# Altium PCB DVR8412.PcbDoc
Units mil, origin at the board's own origin, x right, y up, seen from the top; angles counter-clockwise.
Board outline 2960 x 1810 mil, 2 copper layers (Top Layer, Bottom Layer), stack 61.756 mil thick; 51 components, 30 nets, 153 pads, 377 vias.
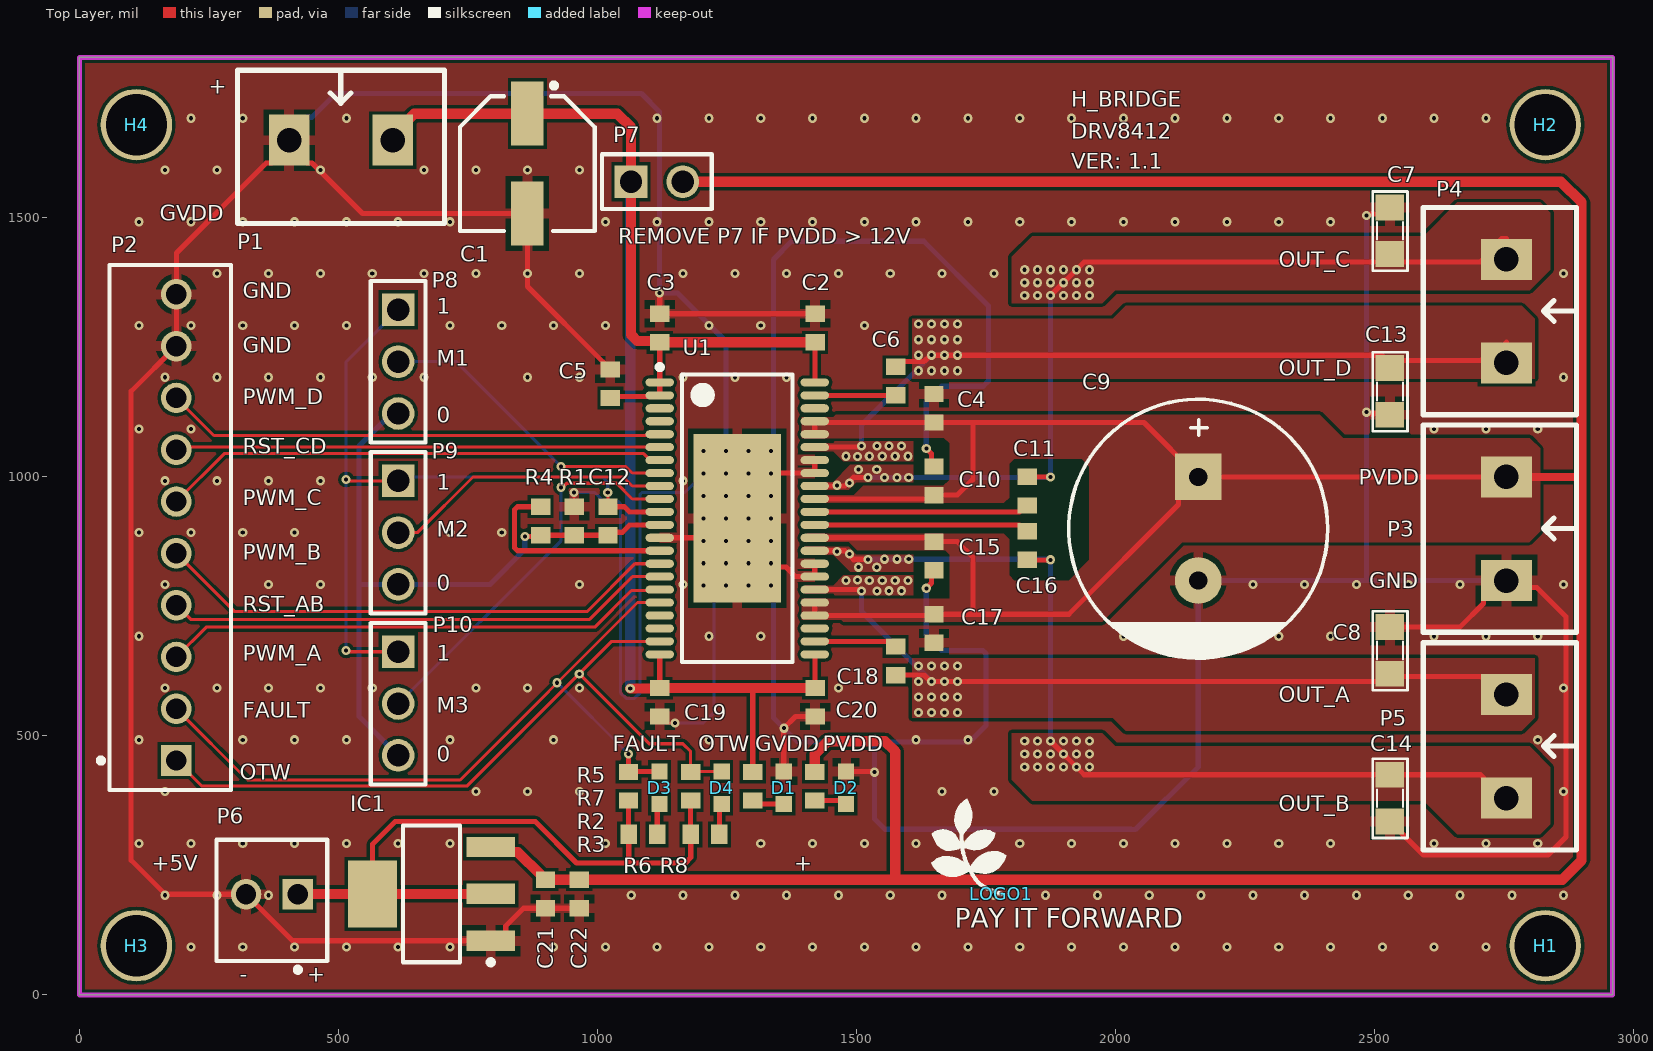
[diagram p0: Top Layer view]
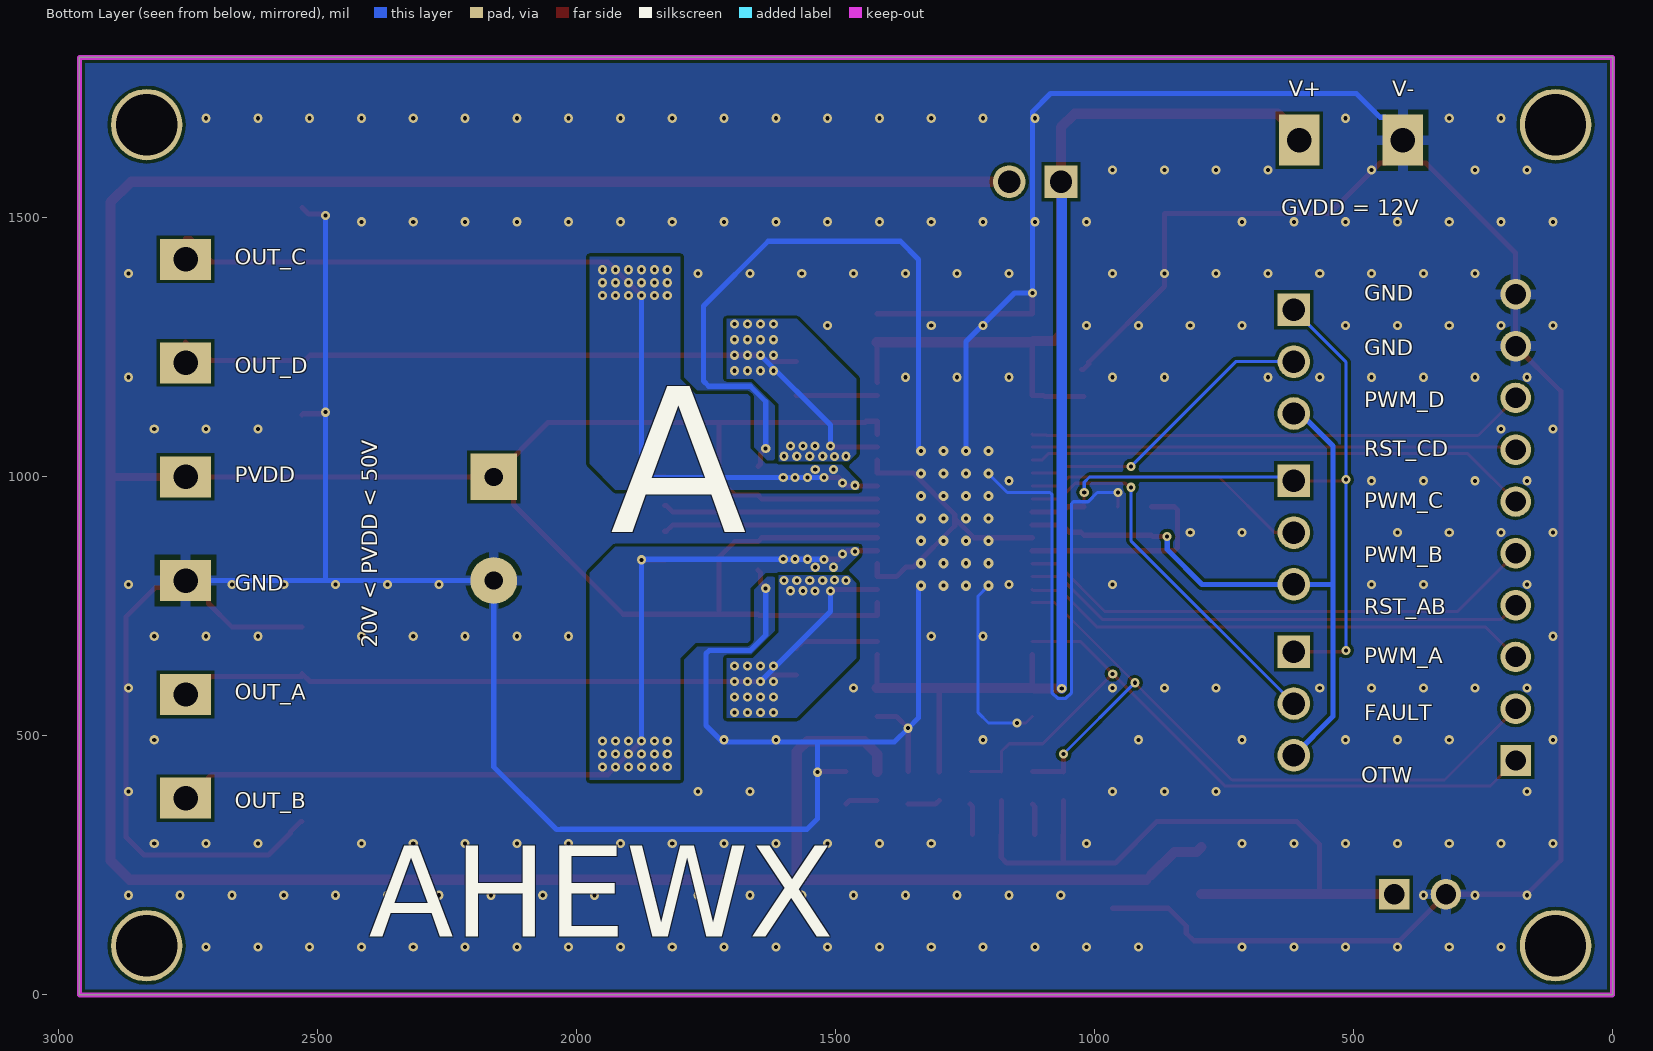
[diagram p1: Bottom Layer view, seen from below]
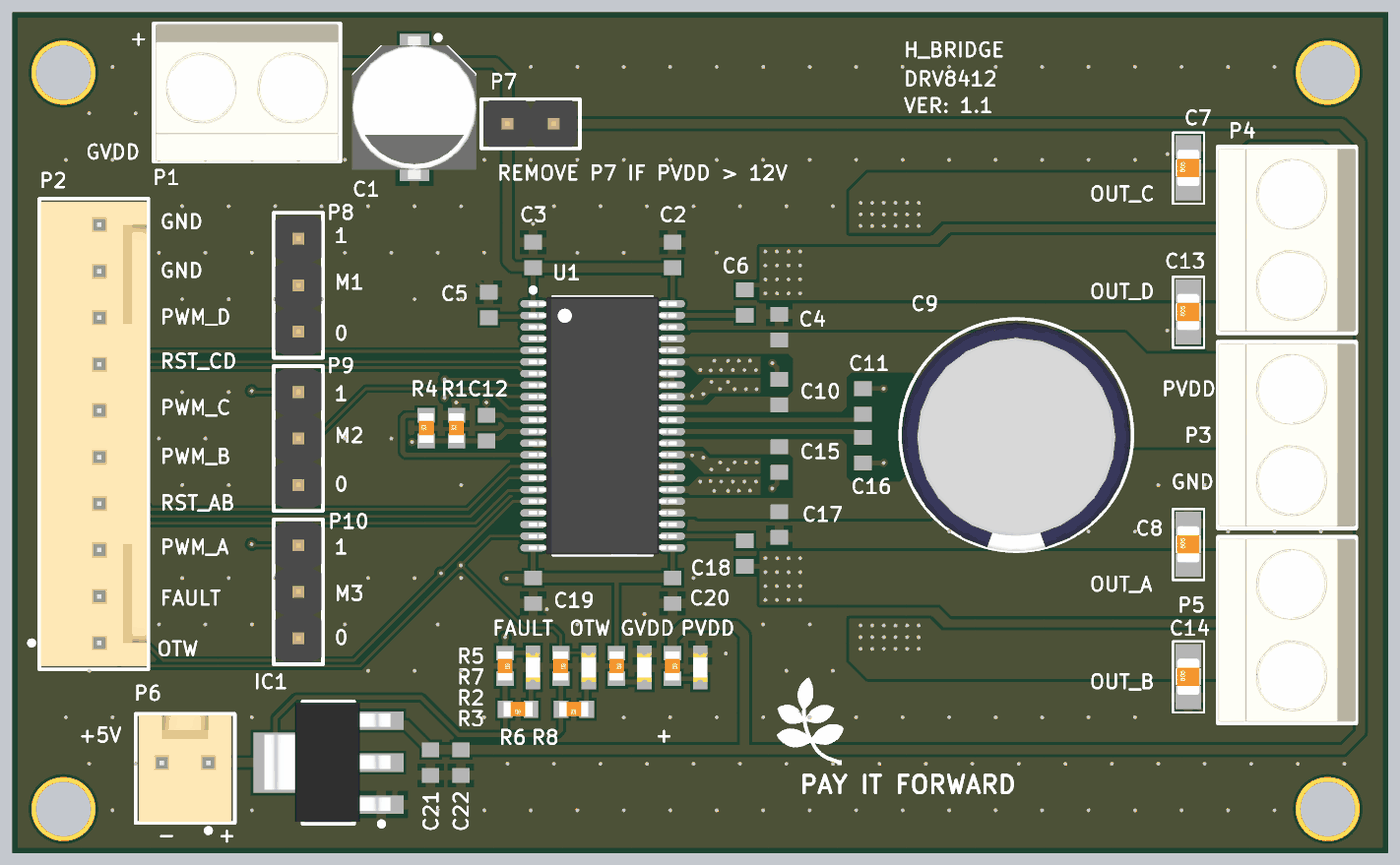
[diagram p2: 3D render of the assembled board from above, using the file's embedded part models]

## Layer stack, top to bottom
Top Solder: solder mask 1, SM-001, Dk 4
Top Layer: signal copper 1.378
Dielectric 1: core 59, Core-043, Dk 4.3
Bottom Layer: signal copper 1.378
Bottom Solder: solder mask 1, SM-001, Dk 4

## Board outline
0,0 2960,0 2960,1810 0,1810

## Design rules (kind name [scope] priority, off if disabled: settings)
Clearance [All] p1: gap=6 ignorepadtopadclearanceinfootprint=FALSE
HoleSize [All] p1: absolutevalues=TRUE maxlimit=150 minlimit=1 maxpercent=80.000 minpercent=20.000
MinimumSolderMaskSliver [All] p1: minsoldermaskwidth=5
PolygonConnect PolygonConnect_PVDD [InNet('PVDD') vs InNet('PVDD')] p1: connectstyle=Direct reliefconductorwidth=10 reliefentries=4 polygonreliefangle="90 Angle" airgapwidth=10
PolygonConnect PolygonConnect_OUTD [InNet('OUTD') vs InNet('OUTD')] p2: connectstyle=Direct reliefconductorwidth=10 reliefentries=4 polygonreliefangle="90 Angle" airgapwidth=10
PolygonConnect PolygonConnect_OUTC [InNet('OUTC') vs InNet('OUTC')] p3: connectstyle=Direct reliefconductorwidth=10 reliefentries=4 polygonreliefangle="90 Angle" airgapwidth=10
PolygonConnect PolygonConnect_OUTB [InNet('OUTB') vs InNet('OUTB')] p4: connectstyle=Direct reliefconductorwidth=10 reliefentries=4 polygonreliefangle="90 Angle" airgapwidth=10
PolygonConnect PolygonConnect_OUTA [InNet('OUTA') vs InNet('OUTA')] p5: connectstyle=Direct reliefconductorwidth=10 reliefentries=4 polygonreliefangle="90 Angle" airgapwidth=10
PolygonConnect PolygonConnect_GND [InNet('GND') vs InNet('GND')] p6: thpad.connectstyle=Relief thpad.reliefconductorwidth=20 thpad.reliefentries=4 thpad.polygonreliefangle="90 Angle" thpad.airgapwidth=10 smdpad.connectstyle=Relief smdpad.reliefconductorwidth=20 smdpad.reliefentries=4 smdpad.polygonreliefangle="90 Angle" smdpad.airgapwidth=10 via.connectstyle=Direct via.reliefconductorwidth=10 via.reliefentries=4 via.polygonreliefangle="90 Angle" via.airgapwidth=10
PolygonConnect [All] p7: connectstyle=Relief reliefconductorwidth=10 reliefentries=4 polygonreliefangle="90 Angle" airgapwidth=10
RoutingVias [All] p1: holewidth=28 width=50 viastyle="Through Hole" minholewidth=7.87 minwidth=17.72 maxholewidth=150 maxwidth=150
SilkToSilkClearance [All] p1: silktosilkclearance=0
SilkToSolderMaskClearance [IsPad] p1: minsilkscreentomaskgap=0 clearancetoexposedcopper=TRUE
SolderMaskExpansion SolderMaskExpansion_2 [IsVia and InComponent('U1')] p1: expansion=4 istentingtop=FALSE
SolderMaskExpansion SolderMaskExpansion_1 [IsVia] p2: expansion=4 istentingtop=TRUE
SolderMaskExpansion [All] p3: expansion=0 istentingtop=FALSE
Width [All] p1: maxlimit=30 minlimit=6 preferedwidth=10
26 further rules are at their usual default settings.

## Components (designator, comment, footprint, x,y, rotation, side; value= is the part's Value field where it differs from the comment)
C1 "Cap Pol SMD" "CAP ALU SIZE D" 865,1605 r270 top value=47uF
C2 "Cap Non-Pol SMD" CAP-SM-0603 1420.43,1287.5 r270 top value=1uF
C3 "Cap Non-Pol SMD" CAP-SM-0603 1120.43,1287.5 r270 top value=1uF
C4 "Cap Non-Pol SMD" CAP-SM-0603 1650,1132.5 r270 top value=100nF
C5 "Cap Non-Pol SMD" CAP-SM-0603 1025,1180 r270 top value=1uF
C6 "Cap Non-Pol SMD" CAP-SM-0603 1575.87,1185.07 r270 top value=100nF
C7 "Cap Non-Pol SMD" CAP-SM-0805 2530,1430 r90 top value=1uF
C8 "Cap Non-Pol SMD" CAP-SM-0805 2530,620 r90 top value=1uF
C9 "Cap Pol" CP2/5 2160,1000 r270 top value=1000uF
C10 "Cap Non-Pol SMD" CAP-SM-0603 1650,992.5 r270 top value=100nF
C11 "Cap Non-Pol SMD" CAP-SM-0603 1830,972.56 r90 top value=100nF
C12 "Cap Non-Pol SMD" CAP-SM-0603 1020.43,914.94 r90 top value=100nF
C13 "Cap Non-Pol SMD" CAP-SM-0805 2530,1120 r90 top value=1uF
C14 "Cap Non-Pol SMD" CAP-SM-0805 2530,335 r90 top value=1uF
C15 "Cap Non-Pol SMD" CAP-SM-0603 1650,847.5 r90 top value=100nF
C16 "Cap Non-Pol SMD" CAP-SM-0603 1830,867.44 r90 top value=100nF
C17 "Cap Non-Pol SMD" CAP-SM-0603 1650,707.5 r90 top value=100nF
C18 "Cap Non-Pol SMD" CAP-SM-0603 1575.87,645 r270 top value=100nF
C19 "Cap Non-Pol SMD" CAP-SM-0603 1120.43,564.94 r90 top value=1uF
C20 "Cap Non-Pol SMD" CAP-SM-0603 1420.43,564.94 r90 top value=1uF
C21 "Cap Non-Pol SMD" CAP-SM-0603 900,195 r90 top value=1uF
C22 "Cap Non-Pol SMD" CAP-SM-0603 965,195 r90 top value=100nF
D1 "Red, 2V" WL-SMCW_0603_H=0.7mm 1360,400 r270 top
D2 "Red, 2V" WL-SMCW_0603_H=0.7mm 1480,400 r270 top
D3 "Red, 2V" WL-SMCW_0603_H=0.7mm 1120,400 r270 top
D4 "Red, 2V" WL-SMCW_0603_H=0.7mm 1240,400 r270 top
H1 "Hole" "LO KHOAN 3MM" 2830,95 r0 top
H2 "Hole" "LO KHOAN 3MM" 2830,1680 r0 top
H3 "Hole" "LO KHOAN 3MM" 110,95 r0 top
H4 "Hole" "LO KHOAN 3MM" 110,1680 r0 top
IC1 "LM1117" SOT223-4N 680,195 r180 top value=LM317
LOGO1 "LOGO PIF" "PIF LOGO SMALL TOP" 1590,384 r180 top
P1 "Domino 2" "DOMINO 2- 5mm" 505,1650 r0 top
P2 "61901011121" 61901011121 175.43,902.5 r270 top
P3 "Domino 2" "DOMINO 2- 5mm" 2755,900 r270 top
P4 "Domino 2" "DOMINO 2- 5mm" 2755,1320 r270 top
P5 "Domino 2" "DOMINO 2- 5mm" 2755,480 r270 top
P6 "61900211121" 61900211121 371.79,182.52 r0 top
P7 "61300211121" 61300211121 1115,1570 r0 top
P8 "61300311121" 61300311121 615.43,1222.5 r270 top
P9 "61300311121" 61300311121 615.43,892.5 r270 top
P10 "61300311121" 61300311121 615.43,562.5 r270 top
R1 "RESISTOR SMD" RES-SM-0603 955.43,887.94 r90 top value=1
R2 "RESISTOR SMD" RES-SM-0603 1300,430 r270 top value=10K
R3 "RESISTOR SMD" RES-SM-0603 1420,430 r270 top value=10K
R4 "RESISTOR SMD" RES-SM-0603 890.43,887.94 r90 top value=47K
R5 "RESISTOR SMD" RES-SM-0603 1060,430 r270 top value=4.7K
R6 "RESISTOR SMD" RES-SM-0603 1115,310 r180 top value=330
R7 "RESISTOR SMD" RES-SM-0603 1180,430 r270 top value=4.7K
R8 "RESISTOR SMD" RES-SM-0603 1235,310 r180 top value=330
U1 "DRV8412" TSOP64P810X150_HS-45N 1270.04,920 r0 top

## Footprints (in the part's own frame and the unit in brackets; to place one, negate y for a bottom-side part, rotate by r counter-clockwise, add the part's x,y. Pads: shape width x height; smd on the part's side, far side on the other; paste and mask are expansions set on the pad)
61300211121 [mm] "Pin Header, pitch 2.54 mm, THT, Vertical, single row, 2p"
  rect 1.6x1.6 hole 1.1: 1(-1.27,0)
  round 1.6 hole 1.1: 2(1.27,0)
  silkscreen extent -2.69,-1.35 2.69,1.35, body extent -2.54,-1.27 2.54,1.27, height 8.57
61300311121 [mm] "Pin Header, pitch 2.54 mm, THT, Vertical, single row, 3p"
  rect 1.6x1.6 hole 1.1: 1(-2.54,0)
  round 1.6 hole 1.1: 2(0,0) 3(2.54,0)
  silkscreen extent -3.96,-1.35 3.96,1.35, body extent -3.81,-1.27 3.81,1.27, height 8.57
61900211121 [mm] "2.54mm Male Locking Header, 2p"
  rect 1.5x1.5 hole 1: 1(1.27,0.3)
  round 1.5 hole 1: 2(-1.27,0.3)
  silkscreen extent -2.71,-3.52 2.71,2.98, body extent -2.54,-2.9 2.54,2.9, height 11.53
61901011121 [mm] "2.54mm Male Locking Header, 10p"
  rect 1.5x1.5 hole 1: 1(11.43,0.3)
  round 1.5 hole 1: 2(8.89,0.3) 3(6.35,0.3) 4(3.81,0.3) 5(1.27,0.3) 6(-1.27,0.3) 7(-3.81,0.3) 8(-6.35,0.3) 9(-8.89,0.3) 10(-11.43,0.3)
  silkscreen extent -12.87,-3.52 12.87,2.98, body extent -12.7,-2.9 12.7,2.9, height 11.53
"CAP ALU SIZE D" [mm] "Capacitor, Aluminium Electrolytric, 6.6mm L X 6.6mm W X 5.4mm H, IPC Medium Density"
  rect 3.15x1.6 smd: 1(-2.45,0) 2(2.45,0)
  silkscreen extent -3.95,-3.3 3.3,3.3, body extent -3.9,-3.4 3.9,3.4, height 5.7
CAP-SM-0603 [mm] "SMD Ceramic Capacitor Size 0603"
  rect 0.8x0.95 smd: 1(-0.7,0) 2(0.7,0)
  body extent -0.85,-0.45 0.85,0.45, height 0.6
CAP-SM-0805 [mil]
  rect 50x55 smd: 1(0,0) 2(90,0)
  silkscreen extent -32,-34 121,33, body extent 6,-25 84,25, height 31
CP2/5 [mil] "Tu hoa 1000uF/25V,50V"
  rect 90x90 hole 35: 1(0,0)
  round 90 hole 35: 2(200,0)
  silkscreen extent -150,-250 350,250, body extent -142,-246 350,246, height 984
"DOMINO 2- 5mm" [mm]
  rect 2x2.5 hole 1.2: 1(-2.54,0) 2(2.54,0)
  silkscreen extent -5.08,-4.08 5.08,3.43, body extent -5,-4.07 5,3.43, height 10
"LO KHOAN 3MM" [mil]
  round 138 hole 118.1: 1(0,0)
"PIF LOGO SMALL TOP" [mil]
  rect 10x10 on Top Overlay: 1(-190,189)
  silkscreen extent -199,5 -55,189
RES-SM-0603 [mm]
  rect 0.8x0.95 smd: 1(-0.014,0) 2(1.386,0)
  body extent -0.11,-0.4 1.49,0.4, height 0.3
SOT223-4N [mm] "SOT223, 4-Leads, Body 6.5x3.5mm, Pitch 2.3mm, Lead Span 7mm, IPC Medium Density"
  rect 2.4x1 smd: 1(-2.9,2.3) 2(-2.9,0) 3(-2.9,-2.3)
  rect 2.4x3.3 smd: 4(2.9,0)
  silkscreen extent -3.03,-3.35 1.4,3.47, body extent -3.39,-3.27 3.5,3.23, height 1.72
TSOP64P810X150_HS-45N [mm] "TSOP, 44-Leads, Body 14.00x6.10mm, Pitch 0.64mm, Thermal Pad 8.26x4.31mm, IPC Medium Density"
  oval 1.4x0.4 smd: 1(-3.8,6.667) 2(-3.8,6.032) 3(-3.8,5.397) 4(-3.8,4.763) 5(-3.8,4.127) 6(-3.8,3.492) 7(-3.8,2.857) 8(-3.8,2.222) 9(-3.8,1.587) 10(-3.8,0.953) 11(-3.8,0.318) 12(-3.8,-0.318) 13(-3.8,-0.953) 14(-3.8,-1.587) 15(-3.8,-2.222) 16(-3.8,-2.857) 17(-3.8,-3.492) 18(-3.8,-4.127) 19(-3.8,-4.763) 20(-3.8,-5.397) 21(-3.8,-6.032) 22(-3.8,-6.667) 23(3.8,-6.667) 24(3.8,-6.032) 25(3.8,-5.397) 26(3.8,-4.763) 27(3.8,-4.127) 28(3.8,-3.492) 29(3.8,-2.857) 30(3.8,-2.222) 31(3.8,-1.587) 32(3.8,-0.953) 33(3.8,-0.318) 34(3.8,0.318) 35(3.8,0.953) 36(3.8,1.587) 37(3.8,2.222) 38(3.8,2.857) 39(3.8,3.492) 40(3.8,4.127) 41(3.8,4.763) 42(3.8,5.397) 43(3.8,6.032) 44(3.8,6.667)
  rect 4.31x8.26 smd: 45(0,0)
  silkscreen extent -3.92,-7.05 2.7,7.54, body extent -4.05,-7.05 4.05,7.05, height 1.5
WL-SMCW_0603_H=0.7mm [mm] "SMD Mono-color Chip LED, body 1.6x0.8mm"
  rect 0.8x0.8 smd: 1(-0.8,0) 2(0.8,0)
  body extent -0.8,-0.4 0.8,0.4, height 0.7

## Part data
C1 C9: "Polarized Capacitor (Radial)"
C2 C3 C4 C5 C6 C7 C8 C10 C11 C12 C13 C14 C15 C16 C17 C18 C19 C20 C21 C22: "Capacitor"
D1 D2 D3 D4: library part 150060RS75000, "WL-SMCW SMT Mono-color Chip LED Waterclear, size 0603, Red, 2V, 140deg", Emitting Color=Red, Forward Voltage typ.=2V, Operating Temperature="-40 to +85degC", Chip Technology=AlInGaP, ComponentLink1Description=Manufacturer, ComponentLink1URL=http://www.we-online.de, ComponentLink2Description=Datasheet, ComponentLink2URL=https://www.we-online.com/catalog/datasheet/150060RS75000.pdf, Dominant Wavelength typ.=625nm, Luminous Intensity typ.=250mcd, Mounting Technology=SMT, Packaging="Tape and Reel", Part Number=150060RS75000, Peak Wavelength typ.=630nm, Published Date="December 2019", Publisher="Wurth Elektronik", Size=0603, Viewing Angle=140deg
H1 H2 H3 H4: "Hole 3mm"
IC1: "Available in 1.8V, 2.5V, 2.85V, 3.3V, 5V, and  Adjustable Versions"
P1 P3 P4 P5: "Domino, 2-Pin", LatestRevisionDate=17-Jul-2002, LatestRevisionNote="Re-released for DXP Platform.", Publisher="Altium Limited"
P2: "WR-WTB THT Male Vertical Locking Header, pitch 2.54mm, 10p", Contact Resistance=20mOhm, Operating Temperature="-40 to +105degC", Rated Current=3A, Withstanding Voltage=1000VAC, Working Voltage=250VAC, ComponentLink1Description=Manufacturer, ComponentLink1URL=http://www.we-online.de, ComponentLink2Description=Datasheet, ComponentLink2URL=https://www.we-online.com/catalog/datasheet/61901011121.pdf, Gender=Male, Mounting Technology=THT, Packaging=Bag, Part Number=61901011121, Pin Number=10, Pitch=2.54mm, Published Date="January 2020", Publisher="Wurth Elektronik", Type=Vertical
P6: "WR-WTB THT Male Vertical Locking Header, pitch 2.54mm, 2p", Contact Resistance=20mOhm, Operating Temperature="-40 to +105degC", Rated Current=3A, Withstanding Voltage=1000VAC, Working Voltage=250VAC, ComponentLink1Description=Manufacturer, ComponentLink1URL=http://www.we-online.de, ComponentLink2Description=Datasheet, ComponentLink2URL=https://www.we-online.com/catalog/datasheet/61900211121.pdf, Gender=Male, Mounting Technology=THT, Packaging=Bag, Part Number=61900211121, Pin Number=2, Pitch=2.54mm, Published Date="January 2020", Publisher="Wurth Elektronik", Type=Vertical
P7: "WR-PHD Pin Header, THT, pitch 2.54mm, Single Row, Vertical, 2p", Contact Resistance=20mOhm, Manufacturer="Wurth Elektronik", Operating Temperature="-40 to +105degC", Rated Current=3A, Withstanding Voltage=500VAC, Working Voltage=250VAC, ComponentLink1Description=Manufacturer, ComponentLink1URL=http://www.we-online.de, ComponentLink2Description=Datasheet, ComponentLink2URL=https://www.we-online.com/catalog/datasheet/61300211121.pdf, Gender="Pin Header", Manufacturer Part Number=61300211121, Mounting Technology=THT, Orientation=Vertical, Packaging=Bag, Pin Number=2, Pitch=2.54mm, Published Date="May 2020", Row Number=Single
P8 P9 P10: "WR-PHD Pin Header, THT, pitch 2.54mm, Single Row, Vertical, 3p", Contact Resistance=20mOhm, Manufacturer="Wurth Elektronik", Operating Temperature="-40 to +105degC", Rated Current=3A, Withstanding Voltage=500VAC, Working Voltage=250VAC, ComponentLink1Description=Manufacturer, ComponentLink1URL=http://www.we-online.de, ComponentLink2Description=Datasheet, ComponentLink2URL=https://www.we-online.com/catalog/datasheet/61300311121.pdf, Gender="Pin Header", Manufacturer Part Number=61300311121, Mounting Technology=THT, Orientation=Vertical, Packaging=Bag, Pin Number=3, Pitch=2.54mm, Published Date="May 2020", Row Number=Single
R1 R2 R3 R4 R5 R6 R7 R8: "Resistor"
U1: Manufacturer="Texas Instruments", Manufacturer P/N=DRV8412DDWR, ComponentLink1Description="Supplier 1 Link", ComponentLink1URL=https://www.mouser.vn/ProductDetail/Texas-Instruments/DRV8412DDWR/?qs=%2Fqzd9s%252BcLd4TfGj6lnLxVg%3D%3D, Supplier 1=Mouser, Supplier 1 P/N=595-DRV8412DDWR

## Via types
v1: diameter 17.72, hole 7.87, Top Layer to Bottom Layer, tented both sides, 349 vias
v2: diameter 19.68, hole 7.87, Top Layer to Bottom Layer, 28 vias

## Nets (pads, with @x,y where several pads share a name; then routed paths per layer and width w, separated by ;. In a path a pad name is that pad's centre, name@x,y a point inside that pad or via, vN(x,y) a via of type N, cw(c..) or ccw(c..) an arc to the next point about the centre after c; other vN are vias at no path point)
5+: IC1.2 IC1.4 P6.1 R5.2 R6.2 R7.2 R8.2 | length 1369.7
  Top Layer w10: IC1.4 565.83,290.83 610,335 880,335 960,255 1060.44,255 ; R5.2 1060,310.44 R6.2 1060.44,255 ; R7.2 1180,310.44 R8.2 1180.44,265.44 1170,255 1065,255 1060.44,255
  Top Layer w20: P6.1 422.46,195 IC1.4 IC1.2
AGND: C12.1 P8.3 P9.3 P10.3 R1.1 R4.1 U1.12 | length 1373.8
  Top Layer w10: v1(860,885) 888.05,885 R4.1 R1.1 C12.1 1026.33,893.28 1048.28,893.28 1062.5,907.5 U1.12
  Bottom Layer w10: P10.3 540,537.93 540,790 ; P8.3 602.5,1122.5 540,1060 540,790 ; v1(860,885) 860,860 792.5,792.5 P9.3 542.5,792.5 540,790
FAULT: D3.1 P2.2 R5.1 U1.18 | length 1421.5
  Top Layer w6: P2.2 324.74,415 735,415 1077.5,757.5 U1.18
  Top Layer w10: v1(1060,465) R5.1 1060.94,431.5 D3.1
  Bottom Layer w6: v1(922.37,602.63) v1(1060,465)
GND: C1.2 C2.1 C3.1 C4.1 C5.1 C7.2 C8.2 C9.2 C10.1 C13.1 C14.1 C15.1 C17.1 C19.1 C20.1 C21.1 C22.1 D1.1 D2.1 IC1.1 P1.1 P2.9 P2.10 P3.2 P6.2 R1.2 U1.13 U1.29 U1.30 U1.37 U1.38 U1.45 | length 13637.4
  Top Layer w6: v1(955,970) 955,942.93 R1.2 ; C19.1 1132.81,525 v1(1150,525)
  Top Layer w10: P1.1 P1.1@405,1640.16 ; C22.1 C21.1 857.17,167.44 823,133.28 823,119.13 808.32,104.45 IC1.1 411.67,104.45 P6.2 165.67,194.33 100,260 100,1165.26 P2.9 P2.10 187.24,1432.24 360.79,1605.79 370.63,1605.79 P1.1@405,1640.16 ; C5.1 1022.05,1207.56 1011.3,1218.31 1011.3,1221.26 865,1367.56 C1.2 546.46,1508.54 449.21,1605.79 439.37,1605.79 P1.1@405,1640.16 ; v1(1120,1355) 1120.43,1354.57 C3.1 C2.1 ; U1.13 1232.54,882.5 U1.45 ; D1.1 v1(1360,515) 1382.38,537.38 C20.1 ; U1.30 U1.29 1382.54,807.5 1364.02,826.02 1349.88,826.02 1270.04,905.86 U1.45 ; U1.38 U1.37 1349.88,1007.5 1270.04,927.66 U1.45 ; D2.1 1531.42,431.5 1532.91,430 v1(1535,430) ; v1(1635,785) 1645.05,795.05 1645.05,814.99 C15.1 ; v1(1635,1055) 1645.05,1044.95 1645.05,1025.01 C10.1 ; v1(2485,1125) 2487.09,1125 2489.99,1122.1 2527.9,1122.1 C13.1 ; v1(2485,1505) 2487.09,1505 2489.99,1507.9 2517.9,1507.9 C7.2 ; C14.1 2532.5,335 2552.5,315 2552.5,312.5 2595,270 2835,270 2870,305 2870,730 2813.35,786.65 2768.35,786.65 P3.2 2745.16,800 2710.79,765.63 2710.79,755.79 2665,710 C8.2
  Bottom Layer w6: v1(955,970) 994.74,970 1012.6,952.14 1041,952.14 1044.52,948.63 1044.52,583.62 1055.65,572.49 1071.39,572.49 1082.52,583.62 1082.52,966.49 1086.03,970 1168.46,970 v2(1205.08,1006.61) ; v1(1150,525) 1205,525 1225,545 1225,770.16 v2(1205.08,790.08)
  Bottom Layer w10: P1.1 405,1659.84 439.37,1694.21 449.21,1694.21 495,1740 1085,1740 1120,1705 v1(1120,1355) 1155,1355 1248.39,1261.61 v2(1248.39,1049.92) ; v2(1335,790.08) 1335,787.46 1340,782.46 1340,535 v1(1360,515) 1386.71,488.29 1535,488.29 ; v2(1335,1049.92) 1335,1052.54 1340,1057.54 1340,1420 1375,1455 1630,1455 1755,1330 1755,1185 1745,1175 1665,1175 1635,1145 v1(1635,1055) ; v1(1635,785) 1635,695 1665,665 1744.14,665 1750,659.14 1750,520 1718.29,488.29 1535,488.29 ; v1(2485,1505) v1(2485,1125) 2485,800 ; P3.2 2485,800 ; 1535,488.29 v1(1535,430) 1535,340 1555,320 2030,320 2030.86,319.14 2039.14,319.14 2160,440 C9.2 2485,800
  other v1: 215.43,92.5 315.43,92.5 415.43,92.5 515.43,92.5 615.43,92.5 715.43,92.5 915.43,92.5 1015.43,92.5 1115.43,92.5 1215.43,92.5 1315.43,92.5 1415.43,92.5 1515.43,92.5 1615.43,92.5 1715.43,92.5 1815.43,92.5 1915.43,92.5 2015.43,92.5 2115.43,92.5 2215.43,92.5 2315.43,92.5 2415.43,92.5 2515.43,92.5 2615.43,92.5 2715.43,92.5 165.43,192.5 265.43,192.5 365.43,192.5 1065.43,192.5 1165.43,192.5 1265.43,192.5 1365.43,192.5 1465.43,192.5 1565.43,192.5 1665.43,192.5 1765.43,192.5 1865.43,192.5 1965.43,192.5 2065.43,192.5 2165.43,192.5 2265.43,192.5 2365.43,192.5 2465.43,192.5 2565.43,192.5 2665.43,192.5 2765.43,192.5 2865.43,192.5 115.43,292.5 215.43,292.5 315.43,292.5 415.43,292.5 515.43,292.5 615.43,292.5 715.43,292.5 1015.43,292.5 1315.43,292.5 1415.43,292.5 1515.43,292.5 1615.43,292.5 1715.43,292.5 1815.43,292.5 1915.43,292.5 2015.43,292.5 2115.43,292.5 2215.43,292.5 2315.43,292.5 2415.43,292.5 2615.43,292.5 2715.43,292.5 2815.43,292.5 165.43,392.5 765.43,392.5 865.43,392.5 965.43,392.5 1665.43,392.5 1765.43,392.5 2865.43,392.5 115.43,492.5 315.43,492.5 415.43,492.5 515.43,492.5 715.43,492.5 915.43,492.5 1215.43,492.5 1615.43,492.5 1715.43,492.5 2815.43,492.5 165.43,592.5 265.43,592.5 365.43,592.5 465.43,592.5 565.43,592.5 765.43,592.5 865.43,592.5 965.43,592.5 1465.43,592.5 2865.43,592.5 115.43,692.5 1215.43,692.5 1315.43,692.5 2015.43,692.5 2115.43,692.5 2215.43,692.5 2315.43,692.5 2415.43,692.5 2615.43,692.5 2715.43,692.5 2815.43,692.5 165.43,792.5 365.43,792.5 465.43,792.5 965.43,792.5 1165.43,792.5 2265.43,792.5 2365.43,792.5 2465.43,792.5 2565.43,792.5 2665.43,792.5 2865.43,792.5 115.43,892.5 215.43,892.5 315.43,892.5 415.43,892.5 715.43,892.5 815.43,892.5 165.43,992.5 265.43,992.5 365.43,992.5 465.43,992.5 1165.43,992.5 115.43,1092.5 215.43,1092.5 2615.43,1092.5 2715.43,1092.5 2815.43,1092.5 165.43,1192.5 265.43,1192.5 365.43,1192.5 465.43,1192.5 565.43,1192.5 665.43,1192.5 865.43,1192.5 965.43,1192.5 1165.43,1192.5 1265.43,1192.5 1365.43,1192.5 2865.43,1192.5 115.43,1292.5 215.43,1292.5 315.43,1292.5 415.43,1292.5 515.43,1292.5 715.43,1292.5 815.43,1292.5 915.43,1292.5 1015.43,1292.5 1215.43,1292.5 1315.43,1292.5 1515.43,1292.5 265.43,1392.5 365.43,1392.5 465.43,1392.5 565.43,1392.5 665.43,1392.5 765.43,1392.5 865.43,1392.5 965.43,1392.5 1165.43,1392.5 1265.43,1392.5 1365.43,1392.5 1465.43,1392.5 1565.43,1392.5 1665.43,1392.5 1765.43,1392.5 2865.43,1392.5 115.43,1492.5 215.43,1492.5 315.43,1492.5 415.43,1492.5 515.43,1492.5 615.43,1492.5 715.43,1492.5 1015.43,1492.5 1115.43,1492.5 1215.43,1492.5 1315.43,1492.5 1415.43,1492.5 1515.43,1492.5 1615.43,1492.5 1715.43,1492.5 1815.43,1492.5 1915.43,1492.5 2015.43,1492.5 2115.43,1492.5 2215.43,1492.5 2315.43,1492.5 2415.43,1492.5 165.43,1592.5 265.43,1592.5 465.43,1592.5 665.43,1592.5 765.43,1592.5 865.43,1592.5 965.43,1592.5 215.43,1692.5 315.43,1692.5 515.43,1692.5 1115.43,1692.5 1215.43,1692.5 1315.43,1692.5 1415.43,1692.5 1515.43,1692.5 1615.43,1692.5 1715.43,1692.5 1815.43,1692.5 1915.43,1692.5 2015.43,1692.5 2115.43,1692.5 2215.43,1692.5 2315.43,1692.5 2415.43,1692.5 2515.43,1692.5 2615.43,1692.5 2715.43,1692.5
  other v2: 1248.39,790.08 1291.69,790.08 1205.08,833.39 1248.39,833.39 1291.69,833.39 1335,833.39 1205.08,876.69 1248.39,876.69 1291.69,876.69 1335,876.69 1205.08,920 1248.39,920 1291.69,920 1335,920 1205.08,963.31 1248.39,963.31 1291.69,963.31 1335,963.31 1248.39,1006.61 1291.69,1006.61 1335,1006.61 1205.08,1049.92 1291.69,1049.92
GVDD: C1.1 C2.2 C3.2 C5.2 C19.2 C20.2 P1.2 P7.1 R2.1 U1.1 U1.2 U1.22 U1.23 U1.44 | length 3171.4
  Top Layer w10: C5.2@1020.43,1155.06 1096.75,1155.06 1099.19,1157.5 U1.2 U1.1 C3.2 C3.2@1117.96,1262.41 ; C19.2@1116.45,591.49 1117.93,590 C19.2 U1.22 ; R2.1 1300,592.5 ; U1.23 1420.43,656.71 C20.2 ; U1.44 1420.43,1183.29 C2.2
  Top Layer w20: P1.2 605,1659.84 639.37,1694.21 646.61,1701.46 C1.1 1038.54,1701.46 1065,1675 P7.1 1065,1274.13 1076.72,1262.41 C3.2@1117.96,1262.41 ; v1(1063.52,591.49) C19.2@1116.45,591.49 ; C19.2 1300,592.5 C20.2 ; C3.2 C2.2
  Bottom Layer w20: v1(1063.52,591.49) 1063.52,1568.52 P7.1
M1: P8.2 U1.8 | length 594.1
  Top Layer w6: v1(930,1020) 1055,1020 1067.5,1007.5 U1.8
  Bottom Layer w6: P8.2 727.5,1222.5 v1(930,1020)
M2: P9.2 U1.9 | length 556.8
  Top Layer w6: P9.2 652.5,892.5 760,1000 1050,1000 1067.5,982.5 U1.9
M3: P10.2 U1.10 | length 754.1
  Top Layer w6: v1(930,980) 933.17,980 941.03,987.86 1037.14,987.86 1067.5,957.5 U1.10
  Bottom Layer w6: P10.2 930,877.07 v1(930,980)
NetC6_2: C6.2 U1.43 | length 156.2
  Top Layer w10: U1.43 C6.2
NetC11_1: C11.1 U1.34 | length 415.5
  Top Layer w10: U1.34 1814.55,932.5 1827.05,945 C11.1
NetC16_2: C16.2 U1.33 | length 415.5
  Top Layer w10: U1.33 1814.55,907.5 1827.05,895 C16.2
NetC18_1: C18.1 U1.24 | length 161.8
  Top Layer w10: U1.24 1562.5,682.5 C18.1@1575.87,669.13
NetD1_2: D1.2 R2.2 | length 62.9
  Top Layer w10: R2.2 1306.94,368.5 D1.2
NetD2_2: D2.2 R3.2 | length 62.9
  Top Layer w10: R3.2 1473.06,375.44 D2.2
NetD3_2: D3.2 R6.1 | length 60.3
  Top Layer w10: R6.1 1115.56,364.06 D3.2
NetD4_2: D4.2 R8.1 | length 60.3
  Top Layer w10: R8.1 1235.56,364.06 D4.2
NetR4_2: R4.2 U1.14 | length 409
  Top Layer w10: R4.2 845.86,942.5 840,936.64 840,863.36 845.86,857.5 U1.14
OTW: D4.1 P2.1 R7.1 U1.21 | length 1446.2
  Top Layer w6: P2.1 236.74,403 748,403 1027.5,682.5 U1.21 ; v1(965.13,619.87) 1100,485 1165,485 1180,470 R7.1 1180.94,431.5 D4.1
OUTA: C8.1 C18.2 P5.1 U1.28 | length 1527.3
  Top Layer w10: U1.28 1505.41,782.5 1507.91,780 v1(1510,780) ; C18.2 1630.47,617.44 1642.91,605 v1(1645,605) v1(1670,605) v1(1695,605) 2515,605 C8.1 ; C8.1@2530,615 2704.93,615 2705.56,614.37 2720.63,614.37 P5.1
  Bottom Layer w10: v1(1510,780) 1510,740 v1(1645,605)
  other v1: 1620,545 1645,545 1670,545 1695,545 1620,575 1645,575 1670,575 1695,575 1620,605 1620,635 1645,635 1670,635 1695,635 1540,780 1562.88,780.21 1587.04,780.21 1480,800 1502.3,800.82 1525,800 1550,800 1575,800 1600,800
OUTB: C14.2 C16.1 P5.2 U1.31 | length 1786.4
  Top Layer w10: U1.31 1477.5,857.5 1495,840 1495.93,840.93 v1(1522.62,840.93) ; C16.1 1874.52,839.88 v1(1874.7,840.06) ; v1(1875,490) 1940,425 C14.2 2704.93,425 2710.79,419.14 2710.79,414.37 2745.16,380 P5.2
  Bottom Layer w10: v1(1522.62,840.93) 1873.71,840.93 1874.64,840 v1(1874.7,840.06) 1874.7,490.3 v1(1875,490)
  other v1: 1825,440 1850,440 1875,440 1900,440 1925,440 1950,440 1825,465 1850,465 1875,465 1900,465 1925,465 1950,465 1825,490 1850,490 1900,490 1925,490 1950,490 1504.18,825.78 1539.43,825.63 1554.05,841.2 1578.41,841.2 1601.1,841.2 1486.46,851.51 1462.59,856.14
OUTC: C7.1 C11.2 P4.1 U1.36 | length 1786.4
  Top Layer w10: U1.36 1477.5,982.5 1495,1000 1495.93,999.07 v1(1522.62,999.07) ; C11.2 1874.52,1000.12 v1(1874.7,999.94) ; v1(1875,1350) 1940,1415 2530,1415 2704.93,1415 2710.79,1420.86 2710.79,1425.63 2745.16,1460 2755,1460
  Bottom Layer w10: v1(1522.62,999.07) 1873.71,999.07 1874.64,1000 v1(1874.7,999.94) 1874.7,1349.7 v1(1875,1350)
  other v1: 1462.59,983.86 1486.46,988.49 1554.05,998.8 1578.41,998.8 1601.1,998.8 1504.18,1014.22 1539.43,1014.37 1825,1350 1850,1350 1900,1350 1925,1350 1950,1350 1825,1375 1850,1375 1875,1375 1900,1375 1925,1375 1950,1375 1825,1400 1850,1400 1875,1400 1900,1400 1925,1400 1950,1400
OUTD: C6.1 C13.2 P4.2 U1.39 | length 1527.3
  Top Layer w10: U1.39 1505.41,1057.5 1507.91,1060 v1(1510,1060) ; C6.1@1575.87,1222.56 1630.47,1222.56 1642.91,1235 v1(1645,1235) v1(1670,1235) v1(1695,1235) 2515,1235 C13.2@2530,1220 ; C13.2@2530,1225 2704.93,1225 2705.56,1225.63 2720.63,1225.63 2755,1260
  Bottom Layer w10: v1(1510,1060) 1510,1100 v1(1645,1235)
  other v1: 1502.3,1039.18 1480,1040 1525,1040 1550,1040 1575,1040 1600,1040 1562.88,1059.79 1587.04,1059.79 1540,1060 1620,1205 1645,1205 1670,1205 1695,1205 1620,1235 1620,1265 1645,1265 1670,1265 1695,1265 1620,1295 1645,1295 1670,1295 1695,1295
PVDD: C4.2 C9.1 C10.2 C15.2 C17.2 C21.2 C22.2 IC1.3 P3.1 P7.2 R3.1 U1.26 U1.27 U1.32 U1.35 U1.40 U1.41 | length 8908.7
  Top Layer w10: U1.27 U1.26 1647.44,732.5 C17.2 1725,735.06 ; U1.32 1642.56,882.5 C15.2 1694.94,875.06 1725,845 1725,735.06 ; U1.35 1642.56,957.5 C10.2 1694.94,964.94 1725,995 1725,1104.94 ; U1.40 U1.41 1440.89,1107.5 1443.45,1104.94 C4.2 1725,1104.94 ; P3.1 C9.1 ; 1725,735.06 1910.06,735.06 2121.89,946.89 2121.89,961.89 C9.1 ; 1725,1104.94 2055.06,1104.94 C9.1
  Top Layer w15: P3.1 2900,1000
  Top Layer w20: IC1.3 803.86,275.87 846.69,275.87 C21.2@891.3,231.26 ; C21.2 C22.2 1575,222.56 ; P7.2 2860,1570 2900,1530 2900,1000 2900,260 2862.56,222.56 1575,222.56 ; R3.1 1420,465 1445,490 1555,490 1575,470 1575,222.56
PWM_A: P2.3 U1.17 | length 987
  Top Layer w6: P2.3 244.74,710 995,710 1065.69,780.69 1118.63,780.69 U1.17
PWM_B: P2.5 U1.15 | length 1018.1
  Top Layer w6: P2.5 299.74,740 980,740 1072.5,832.5 U1.15
PWM_C: P2.6 U1.7 | length 976.7
  Top Layer w6: P2.6 279.74,1045 1089.38,1045 1101.88,1032.5 U1.7
PWM_D: P2.8 U1.5 | length 964.3
  Top Layer w6: P2.8 259.74,1080 1092.36,1080 1092.99,1080.63 1118.57,1080.63 U1.5
RESET_AB: P2.4 U1.16 | length 978.8
  Top Layer w6: P2.4 187.5,752.5 215,725 985,725 1067.5,807.5 U1.16
RESET_CD: P2.7 U1.6 | length 935.3
  Top Layer w6: P2.7 192.24,1057.5 U1.6
VREG: C12.2 P8.1 P9.1 P10.1 U1.11 | length 1465.7
  Top Layer w6: v1(515,665) 518.17,665 520.67,662.5 P10.1 ; v1(515,995) 518.17,995 520.67,992.5 P9.1 ; v1(1020,970) 1020.43,969.57 C12.2
  Top Layer w10: C12.2 1052.5,942.5 1062.5,932.5 U1.11
  Bottom Layer w6: v1(515,665) v1(515,995) 515,1222.07 P8.1 ; P9.1 622.93,1000 1010,1000 1020,990 v1(1020,970)
pads on no net: H1.1 H2.1 H3.1 H4.1 LOGO1.1 U1.3 U1.4 U1.19 U1.20 U1.25 U1.42

## Polygon pours and split planes (outlines as drawn)
GND on Top Layer "GND_L01_P025" (solid, remove dead copper, pour order 25): 0,0 2960,0 2960,1810 0,1810
OUTC on Top Layer "OUTC_L01_P024" (solid, remove dead copper, pour order 24): 1975,1335 2000,1360 2800,1360 2840,1400 2840,1510 2820,1530 2660,1530 2595,1465 1840,1465 1800,1425 1800,1335
OUTD on Top Layer "OUTD_L01_P023" (solid, remove dead copper, pour order 23): 1995,1305.01 2019.99,1330 2785.01,1330 2810,1305.01 2810,1190.01 1607.77,1190.01 1607.77,1305.01
OUTC on Top Layer "OUTC_L01_P020" (solid, remove dead copper, pour order 20): 1485,975 1500,990 1610,990 1610,1025 1490,1025 1455,990 1400,990 1400,975
OUTD on Top Layer "OUTD_L01_P019" (solid, remove dead copper, pour order 19): 1455,1065 1460,1070 1610,1070 1610,1050 1610,1030 1475,1030 1455,1050 1400,1050 1400,1065
OUTB on Top Layer "OUTB_L01_P006" (solid, remove dead copper, pour order 6): 1975,505 2000,480 2800,480 2840,440 2840,330 2820,310 2660,310 2595,375 1840,375 1800,415 1800,505
OUTA on Top Layer "OUTA_L01_P005" (solid, remove dead copper, pour order 5): 1995,534.99 2019.99,510 2785.01,510 2810,534.99 2810,649.99 1607.77,649.99 1607.77,534.99
PVDD on Top Layer "PVDD_L01_P000" (solid, remove dead copper, pour order 0): 1395,1115 1455,1115 1460,1120 2395,1120 2440,1075 2800,1075 2820,1055 2820,895 2799.22,874.22 2129.22,874.22 1975,720 1475,720 1470.47,724.53 1395,724.53 1395,765 1680.07,765 1680.05,850 1671.27,858.76 1501.24,858.76 1485.52,874.48 1439.61,874.48 1401.16,874.22 1401.1,890.61 1784.31,890.69 1795,880 1795,810 1805,800 1910,800 1950,840 1950,1020 1935,1035 1805,1035 1795,1025 1795,960 1785,950 1465,950 1400,950 1400,965 1495,965 1513.04,983.04 1668.04,983.04 1680,995 1680,1065 1670,1075 1395,1075
OUTB on Top Layer "OUTB_L01_P002" (solid, remove dead copper, pour order 2): 1485,865 1500,850 1610,850 1610,815 1490,815 1455,850 1400,850 1400,865
OUTA on Top Layer "OUTA_L01_P001" (solid, remove dead copper, pour order 1): 1455,775 1460,770 1610,770 1610,790 1610,810 1475,810 1455,790 1400,790 1400,775
GND on Bottom Layer "GND_L02_P026" (solid, remove dead copper, pour order 26): 0,0 2960,0 2960,1810 0,1810
OUTC on Bottom Layer "OUTC_L02_P022" (solid, remove dead copper, pour order 22): 1635,1025 1665,1055 1665,1155 1670,1160 1770,1160 1800,1190 1800,1425 1975,1425 1975,1025 1925,975 1485,975 1455,975 1455,990 1490,1025
OUTD on Bottom Layer "OUTD_L02_P021" (solid, remove dead copper, pour order 21): 1610,1070 1610,1140 1660,1190 1710,1190 1710,1305 1575,1305 1460,1190 1460,1070 1460,1045 1475,1030 1610,1030 1610,1050
OUTB on Bottom Layer "OUTB_L02_P004" (solid, remove dead copper, pour order 4): 1635,815 1665,785 1665,685 1670,680 1770,680 1800,650 1800,415 1975,415 1975,815 1925,865 1485,865 1455,865 1455,850 1490,815
OUTA on Bottom Layer "OUTA_L02_P003" (solid, remove dead copper, pour order 3): 1610,770 1610,700 1660,650 1710,650 1710,535 1575,535 1460,650 1460,770 1460,795 1475,810 1610,810 1610,790

## Keep-outs
Keep-Out Layer:
  lines w10: 0,0 2960,0 2960,1810 0,1810 0,1670 0,0

## Silkscreen, mask and mechanical layers (free items; w line width, h text height)
Top Overlay:
  text "H_BRIDGE" at 1915,1715 h30
  text "DRV8412" at 1915,1652.5 h30
  text "VER: 1.1" at 1915,1595 h30
  text "GVDD" at 155,1495 h30
  text "REMOVE P7 IF PVDD > 12V" at 1040,1450 h30
  text "OUT_C" at 2315,1405 h30
  text "GND" at 315,1345 h30
  text "1" at 690,1315 h30
  text "GND" at 315,1240 h30
  text "M1" at 690,1215 h30
  text "OUT_D" at 2315,1195 h30
  text "PWM_D" at 315,1140 h30
  text "0" at 690,1105 h30
  text "RST_CD" at 315,1045 h30
  text "PVDD" at 2470,985 h30
  text "1" at 690,975 h30
  text "PWM_C" at 315,945 h30
  text "M2" at 690,885 h30
  text "PWM_B" at 315,840 h30
  text "GND" at 2490,785 h30
  text "0" at 690,780 h30
  text "RST_AB" at 315,740 h30
  text "PWM_A" at 315,645 h30
  text "1" at 690,645 h30
  text "OUT_A" at 2315,565 h30
  text "M3" at 690,545 h30
  text "FAULT" at 315,535 h30
  text "FAULT" at 1030,470 h30
  text "OTW" at 1195,470 h30
  text "GVDD" at 1305,470 h30
  text "PVDD" at 1435,470 h30
  text "0" at 690,450 h30
  text "OTW" at 310,415 h30
  text "OUT_B" at 2315,355 h30
  text "+5V" at 140,240 h30
Bottom Overlay:
  text "V-" at 425,1735 h30
  text "V+" at 625,1735 h30
  text "GVDD = 12V" at 640,1505 h30
  text "OUT_C" at 2660,1410 h30
  text "GND" at 480,1340 h30
  text "GND" at 480,1235 h30
  text "OUT_D" at 2660,1200 h30
  text "PWM_D" at 480,1135 h30
  text "RST_CD" at 480,1040 h30
  text "PVDD" at 2660,990 h30
  text "PWM_C" at 480,940 h30
  text "PWM_B" at 480,835 h30
  text "A" at 1935.46,797.41 h500
  text "GND" at 2660,780 h30
  text "RST_AB" at 480,735 h30
  text "20V < PVDD < 50V" at 2385,670 h30 r270
  text "PWM_A" at 480,640 h30
  text "OUT_A" at 2660,570 h30
  text "FAULT" at 480,530 h30
  text "OTW" at 485,410 h30
  text "OUT_B" at 2660,360 h30
  text "AHEWX" at 2401.39,54.72 h300

## Text inside footprints (layer, text, board x,y; h text height)
D1: Top Overlay "-" at 310,25 h30
D2: Top Overlay "+" at 1380,240 h30
D3: Top Overlay "+" at 250,1740 h30
D4: Top Overlay "+" at 440,25 h30
LOGO1: Top Overlay "PAY IT FORWARD" at 1690,130 h37.5